# EAGLE board multitCSMv1 (EAGLE 7.5.0)
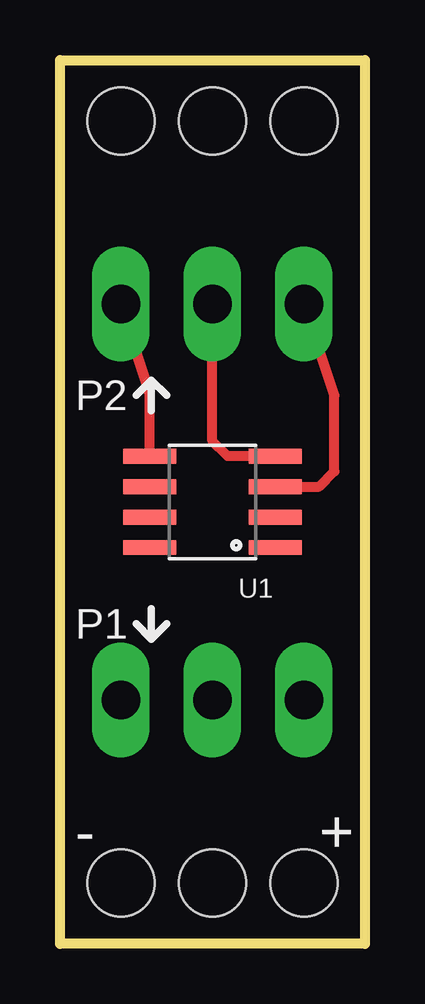
[diagram p0: board, top side]
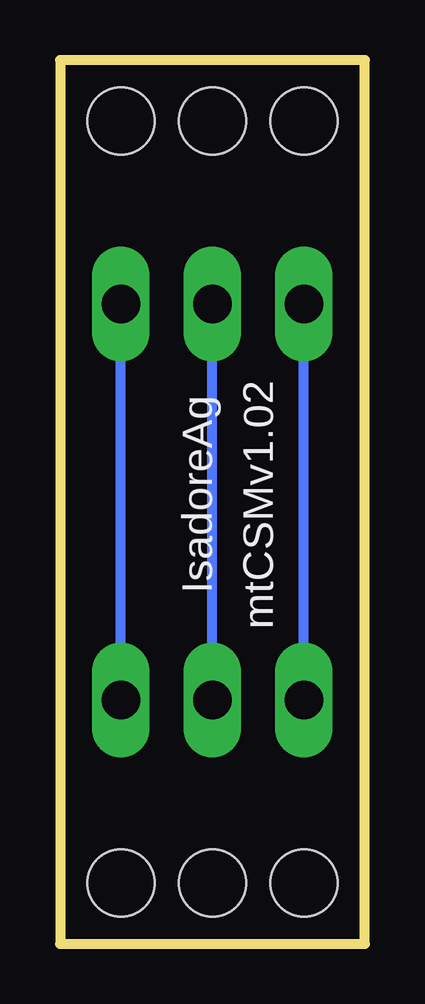
[diagram p1: board, bottom side, seen from below]

Size 12.7 x 36.83 mm. Coordinates in mm from the lower left corner, seen from the top.
Outline: 0,0 0,36.83 12.7,36.83 12.7,0 0,0
Copper layers (1*16): Top 0.035mm / dielectric 1.5mm / Bottom 0.035mm
Design rules "default": minimum track width 10mil, minimum drill 24mil, track to track 8mil, track to pad 8mil, pad to pad 8mil, via to via 8mil, smd to smd 8mil, copper to edge 40mil, drill to drill 8mil, minimum pad ring 10mil, minimum via ring 8mil, stop-mask expansion 4mil, vias tented up to drill 0mil, thermal gap 10mil
Holes 2.8 mm at 2.54,34.29 10.16,34.29 6.35,34.29 2.54,2.54 10.16,2.54 6.35,2.54

## Footprints (pad centres in the part's own frame; a part is rotated, then mirrored left to right if it is on the bottom)
1X03_BIGPAD = drill 1.6 long: P$1 0,0; P$2 -3.81,0; P$3 3.81,0
SO08 = smd 0.61 x 2.21: 1 -1.905,-2.616; 2 -0.635,-2.616; 3 0.635,-2.616; 4 1.905,-2.616; 5 1.905,2.616; 6 0.635,2.616; 7 -0.635,2.616; 8 -1.905,2.616

## Placement (x,y rotation side)
E$3  [1X03_BIGPAD]  6.35,10.16 0 top
E$4  [1X03_BIGPAD]  6.35,26.67 0 top
U1  [SO08]  6.35,18.42 90 top

## Library data of the parts
E$3 E$4 = exoteric-analytics-custom
U1 = SparkFun-DigitalIC

## Nets
S$1: E$3.P$2 E$4.P$2 U1.5
S$2: E$3.P$1 E$4.P$1 U1.4
S$3: E$3.P$3 E$4.P$3 U1.3

## Tracks (layer width: path | path; a pad name or v marks a point on that pad's centre or on a via)
S$1
  Top 0.406: U1.5 3.73,22.94 E$4.P$2
  Bottom 0.406: E$3.P$2 E$4.P$2
S$2
  Top 0.406: U1.4 6.99,20.32 6.35,20.96 E$4.P$1
  Bottom 0.406: E$3.P$1 E$4.P$1
S$3
  Top 0.406: U1.3 10.79,19.05 11.43,19.69 11.43,22.86 E$4.P$3
  Bottom 0.406: E$3.P$3 E$4.P$3

## Text on the board
tNames: P2 | P1 | - | +
bNames: mtCSMv1.02 | IsadoreAg